# Altium PCB PCB_VIPER12A.PcbDoc
Units mil, origin at the board's own origin, x right, y up, seen from the top; angles counter-clockwise.
Board outline 6100 x 4200 mil, 2 copper layers (Top Layer, Bottom Layer); 31 components, 18 nets, 92 pads, 3 vias.
Unrouted connection lines stored in the file: 1.
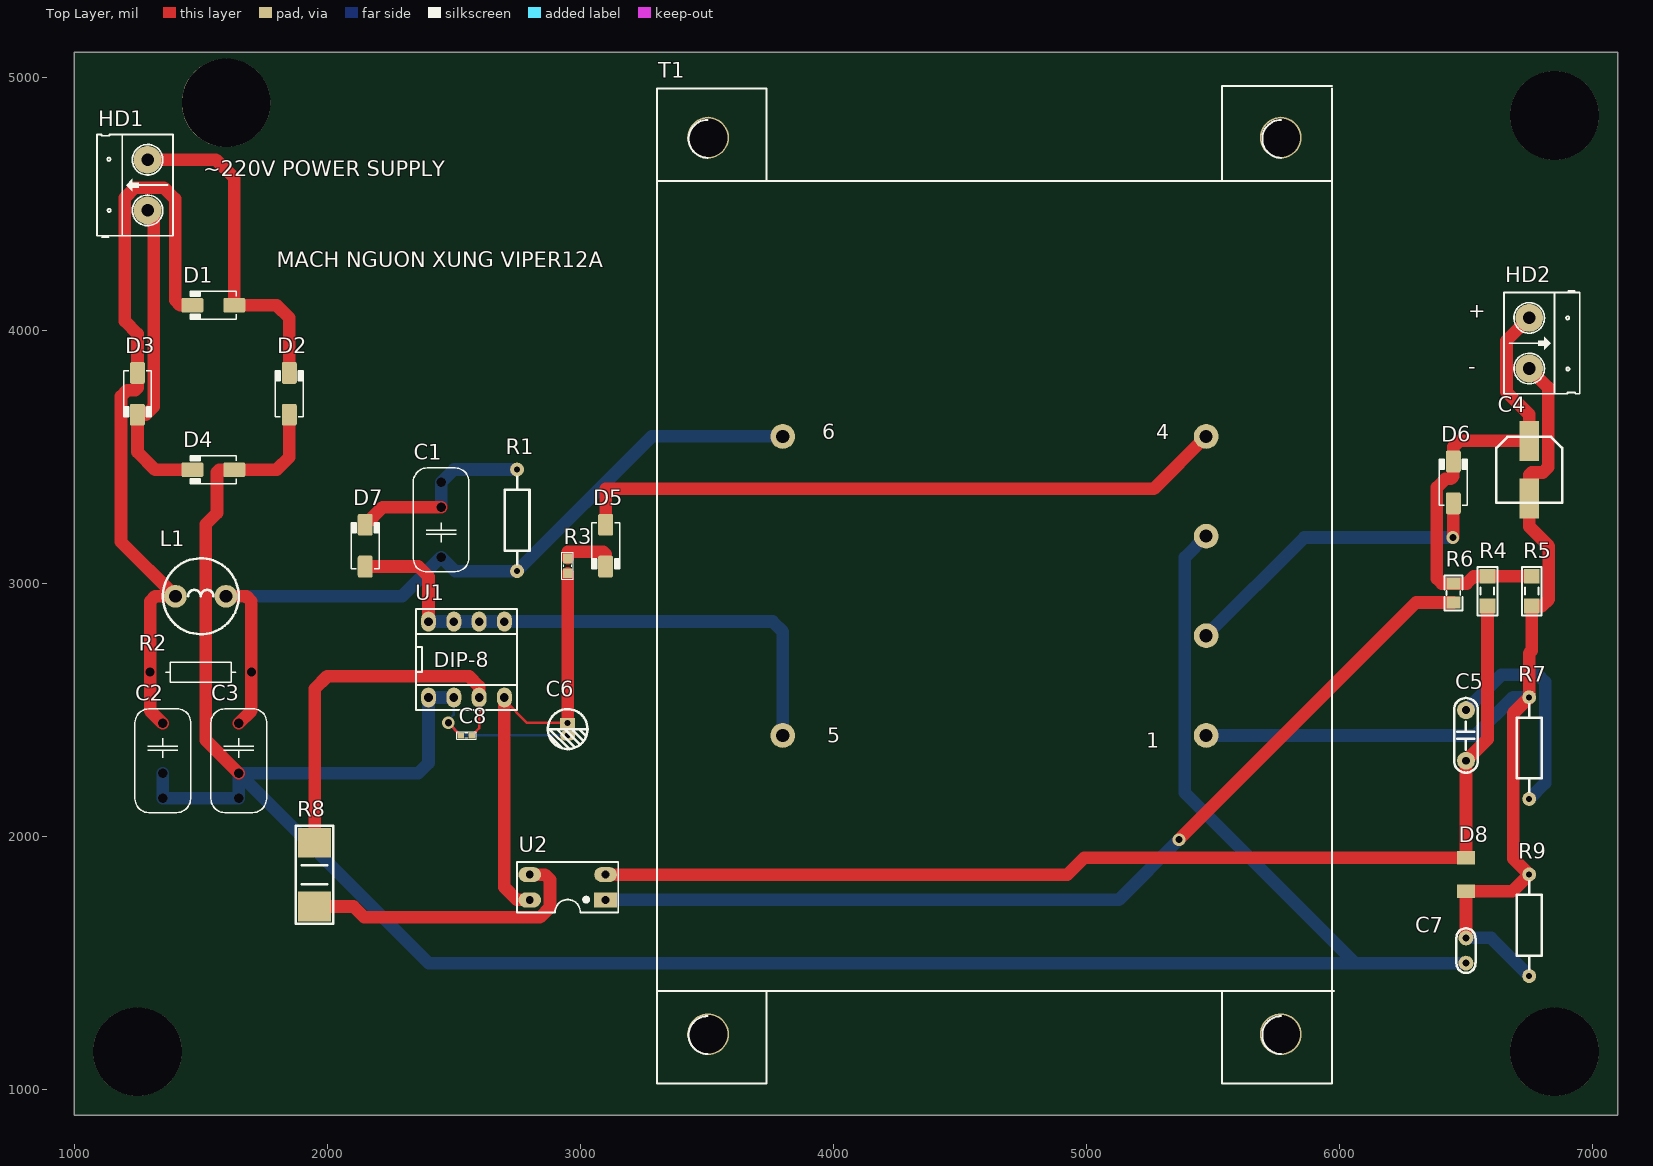
[diagram p0: Top Layer view]
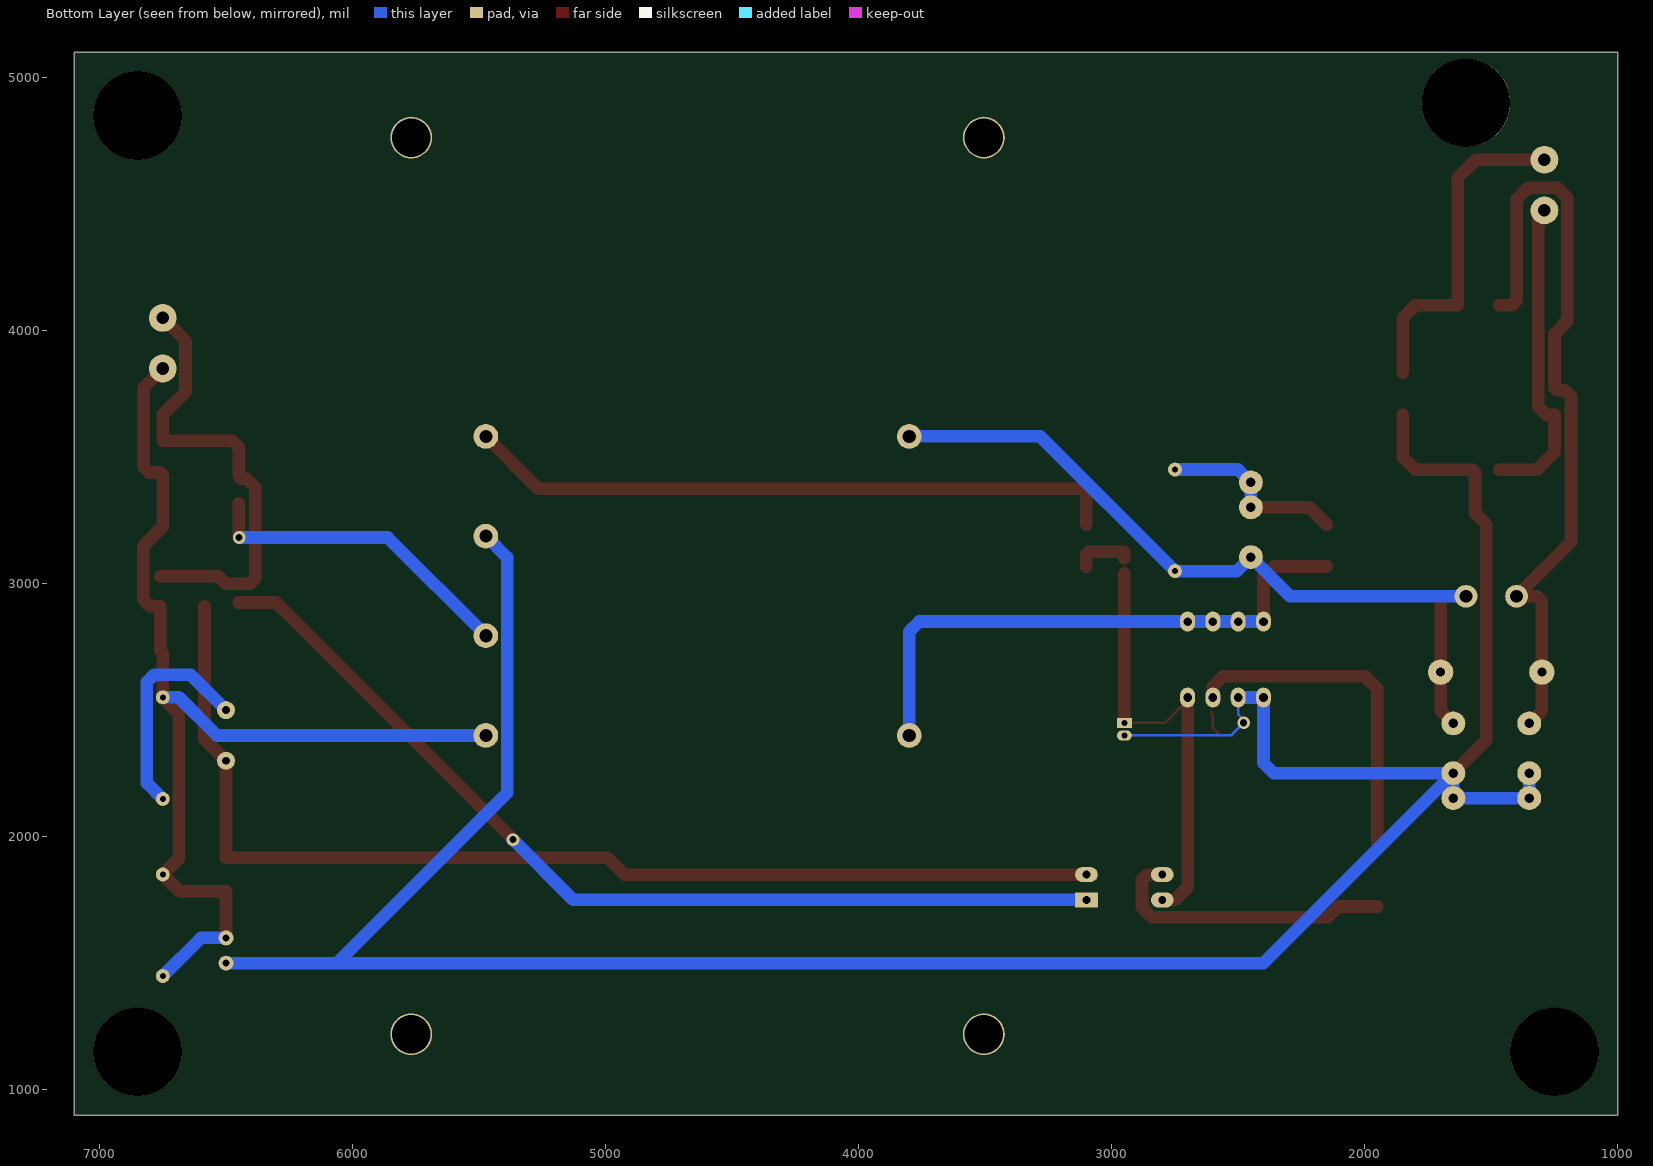
[diagram p1: Bottom Layer view, seen from below]
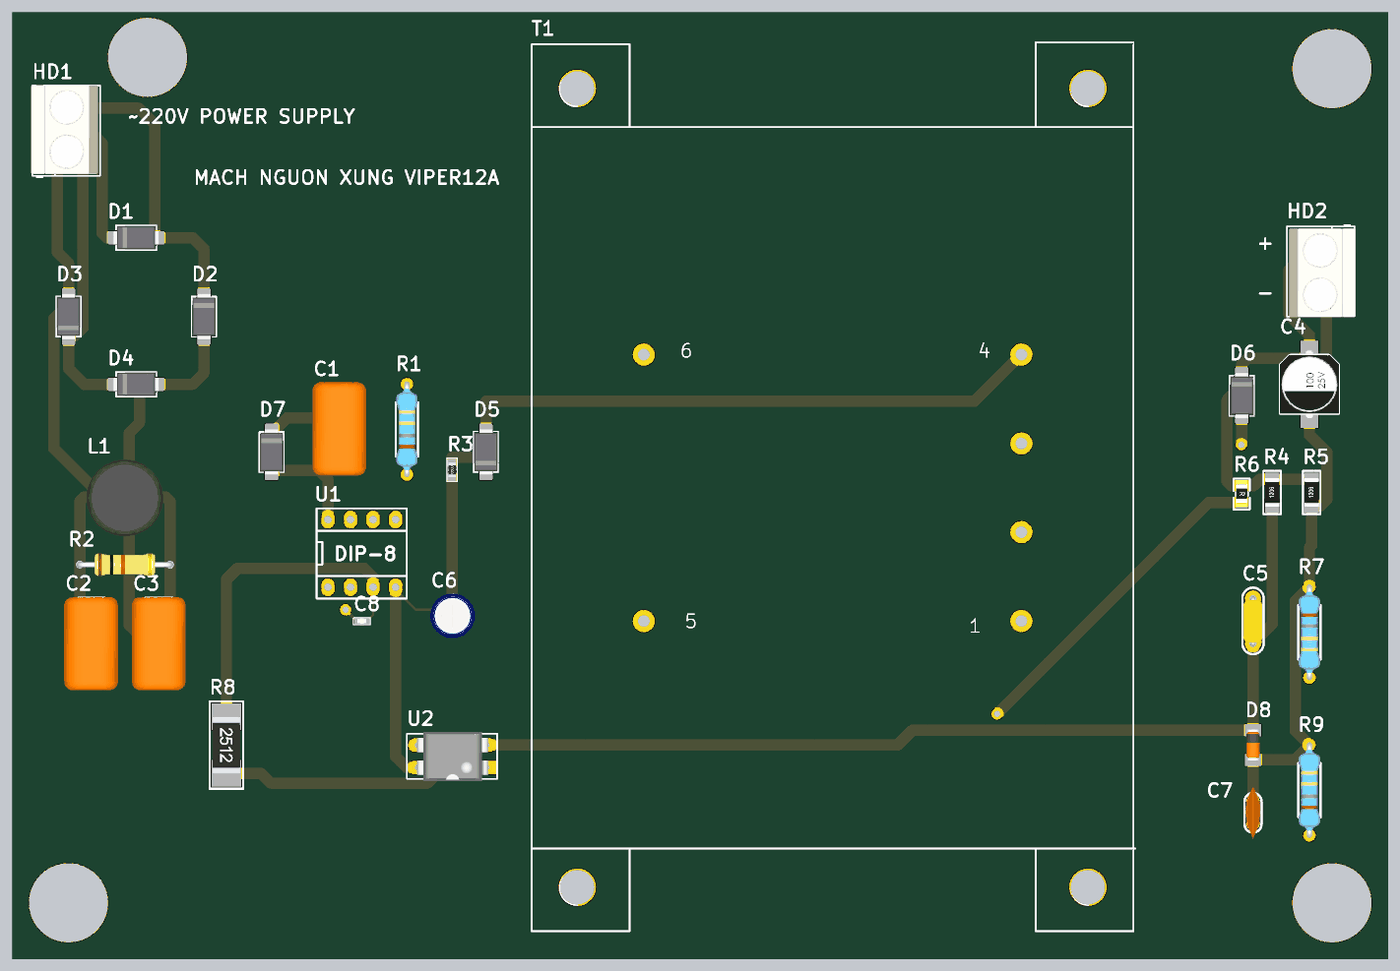
[diagram p2: 3D render of the assembled board from above, using the file's embedded part models]

## Layer stack, top to bottom
Top Solder: solder mask 0.4, Solder Resist, Dk 3.5
Top Layer: signal copper 1.4
Dielectric 1: dielectric 12.6, FR-4, Dk 4.8
Bottom Layer: signal copper 1.4
Bottom Solder: solder mask 0.4, Solder Resist, Dk 3.5

## Board outline
1000,900 7100,900 7100,5100 1000,5100

## Design rules (kind name [scope] priority, off if disabled: settings)
Clearance [All] p1: gap=10 ignorepadtopadclearanceinfootprint=FALSE except(0: Arc-Hole Track-Hole SMDPad-Hole THPad-Hole Via-Hole Fill-Hole Poly-Hole Region-Hole Text-Hole)
PolygonConnect [All] p1: connectstyle=Relief reliefconductorwidth=10 reliefentries=4 polygonreliefangle="90 Angle" airgapwidth=10
RoutingVias [All] p1: holewidth=28 width=50 viastyle="Through Hole" minholewidth=28 minwidth=50 maxholewidth=28 maxwidth=50
SolderMaskExpansion [All] p1: expansion=4 istentingtop=FALSE
Width [All] p1: maxlimit=50 minlimit=10 preferedwidth=50 minimp=50.000000 maximp=50.000000 favimp=50.000000
30 further rules are at their usual default settings.

## Components (designator, comment, footprint, x,y, rotation, side; value= is the part's Value field where it differs from the comment)
C1 "3n3" CAPMF5.0-7.5mm_SL 2450,3252.36 r90 top
C2 "3n9" CAPMF5.0-7.5mm_SL 1350,2300 r270 top
C3 "3n9" CAPMF5.0-7.5mm_SL 1650,2300 r270 top
C4 "120uF" "tu nhom 6.3 (d)" 6750,3450 r270 top
C5 "100nF" "tu tantalum dip5.08" 6500,2400 r90 top
C6 "10uF" "tu hoa 4mm" 2950,2425 r270 top
C7 "222" "tu gom" 6500,1550 r90 top
C8 "33nF" "tu 0402" 2550,2400 r180 top
D1 "Diode  1N4007" DO-214AC 1550,4100 r180 top value=1N4007
D2 "Diode  1N4007" DO-214AC 1850,3750 r90 top value=1N4007
D3 "Diode  1N4007" DO-214AC 1250,3750 r270 top value=1N4007
D4 "Diode  1N4007" DO-214AC 1550,3450 r180 top value=1N4007
D5 "Diode  1N4007" DO-214AC 3100,3150 r270 top value=1N4007
D6 "Diode  1N4007" DO-214AC 6450,3400 r90 top value=1N4007
D7 "Diode  1N4007" DO-214AC 2150,3150 r90 top value=1N4007
D8 "12V" "DIODE ZENNER SMD SOD80" 6500,1850 r270 top
HD1 "Header 2" HED2 1290,4475 r90 top
HD2 "Header 2" HED2 6750,4050 r270 top
L1 "100uH 3A" "CUON CAM 100uH3A" 1500,2950 r0 top
R1 "12k" "tro vach 1/4w" 2750,3250 r270 top
R2 "Carbon Film" RESTH_AXIAL-0.4 1500,2650 r0 top value=1K5
R3 "1M" "tro smd 0603" 2950,3070.47 r90 top
R4 "1k" "tro smd 1206" 6585,2970 r90 top
R5 "10k" "tro smd 1206" 6760,2970 r90 top
R6 "560R" "tro smd 0805" 6452.39,2962.77 r270 top
R7 "56k" "tro vach 1/4w" 6750,2350 r90 top
R8 "10k" "tro smd 2512" 1950,1850 r270 top
R9 "12k" "tro vach 1/4w" 6750,1650 r270 top
T1 "Trans3" TRF_6 4636.67,2990.83 r0 top
U1 "viper12A" DIP.100/8/W.300/L.400 2550,2700 r0 top
U2 "OPTO PC817 DIP4" DIP4 3102.52,1750 r90 top value=PC817

## Footprints (in the part's own frame and the unit in brackets; to place one, negate y for a bottom-side part, rotate by r counter-clockwise, add the part's x,y. Pads: shape width x height; smd on the part's side, far side on the other; paste and mask are expansions set on the pad)
CAPMF5.0-7.5mm_SL [mil] "Capacitor, THT, Metallized Polyester Film"
  round 0 / inner round 0 / far side round 94.49 hole 38 unplated: 1(-147.64,0) 2(49.21,0) 2(147.64,0)
  Bottom Layer lines w50: 49.21,0 147.64,0
  silkscreen extent -205,-110 205,110, body extent -207,-118 207,118, height 354
"CUON CAM 100uH3A" [mil] "100uH3A"
  round 90 hole 50: 1(-100,0) 2(100,0)
  silkscreen extent -150,-150 150,150, body extent -171,-175 171,167, height 394
"DIODE ZENNER SMD SOD80" [mm] "SOD80"
  rect 1.35x1.8 smd: 1(1.675,0) 2(-1.675,0)
  body extent -1.75,-0.76 1.75,0.74, height 1.45
DIP4 [mil] "W.300/L.400"
  rect 60x90 hole 31: 1(0,2.52)
  oval 60x90 hole 31: 2(100,2.52) 3(100,302.52) 4(0,302.52)
  silkscreen extent -50,-47 150,353, body extent -59,-7 159,307, height 170
DIP.100/8/W.300/L.400 [mm]
  oval 1.5x2 hole 0.864: 1(-3.81,-3.81) 2(-1.27,-3.81) 3(1.27,-3.81) 4(3.81,-3.81) 5(3.81,3.81) 6(1.27,3.81) 7(-1.27,3.81) 8(-3.81,3.81)
  silkscreen extent -5.08,-5.08 5.08,5.08, body extent -5.4,-3.88 5.4,3.88, height 4.5
DO-214AC [mm] "JEDEC DO214 variation AC. SMA"
  round 0.508 on Mech15: 0(0,0)
  rrect25% 2.2x1.5 smd: A(-2.1,0) K(2.1,0)
  silkscreen extent -2.3,-1.4 2.3,1.4, body extent -2.6,-1.3 2.6,1.3, height 2.42
HED2 [mil] "Header 2, 2 pin, hight 300mil, Pin to Pin 200, Colour Green"
  round 110 hole 50: 1(0,0) 2(200,0)
  silkscreen extent -106,-100 300,200, body extent -92,-90 302,205, height 394
RESTH_AXIAL-0.4 [mil]
  round 0 / inner round 0 / far side round 100 hole 36 unplated: 1(-200,0) 2(200,0)
  silkscreen extent -138,-40 138,40, body extent -212,-50 212,50, height 102
TRF_6 [mil] "Transformer; 6 Leads"
  round 98 hole 52: 1(836.67,-590.83) 2(836.67,-196.67) 3(836.67,196.67) 4(836.67,590.83) 5(-836.67,-590.83) 6(-836.67,590.83)
  round 165 hole 152: MH1(-1131.67,-1771.67) MH2(1131.67,-1771.67) MH3(1131.67,1771.67) MH4(-1131.67,1771.67)
  silkscreen extent -1333,-1967 1342,1975
"tro smd 0603" [mm] "Chip Capacitor, 2-Leads, Body 1,60x0,80mm, IPC Medium Density"
  rect 1x0.95 smd mask+0.076: 1(-0.75,0) 2(0.75,0)
  silkscreen extent -1.35,-0.58 1.37,0.58, body extent -0.82,-0.42 0.82,0.43, height 0.44
"tro smd 0805" [mm]
  rect 1.2x1.4 smd: 1(-0.946,-0.061) 2(0.954,-0.061)
  silkscreen extent -1.75,-0.97 1.75,0.84, body extent -1.56,-0.76 1.44,0.64, height 0.53
"tro smd 1206" [mm]
  rect 1.5x1.6 smd: 1(-1.5,0) 2(1.5,0)
  silkscreen extent -2.44,-0.99 2.44,0.99, body extent -1.6,-0.8 1.6,0.8, height 0.6
"tro smd 2512" [mm]
  rect 3x3.3 smd: 1(-3.2,0) 2(3.2,0)
  silkscreen extent -4.9,-1.88 4.93,1.88, body extent -3.12,-1.57 3.18,1.58, height 0.82
"tro vach 1/4w" [mm]
  round 1.4 hole 0.6: 1(-5.1,0) 2(5.1,0)
  silkscreen extent -4.39,-1.25 4.42,1.25, body extent -5.38,-1.2 5.38,1.2, height 2.41
"tu 0402" [mm]
  rect 0.65x0.6 smd: 1(-0.55,0) 2(0.55,0)
  silkscreen extent -0.97,-0.38 0.97,0.41, body extent -0.5,-0.27 0.5,0.26, height 0.35
"tu gom" [mm] "Tu gom mini"
  round 1.5 hole 0.7: 1(-1.27,0) 2(1.27,0)
  silkscreen extent -2.25,-0.97 2.22,0.97, body extent -2.92,-0.85 2.92,0.85, height 6.12
"tu hoa 4mm" [mm]
  rect 1x1.5 hole 0.6: 1(-0.635,0)
  oval 1x1.5 hole 0.6: 2(0.635,0)
  silkscreen extent -2,-2 2.01,2.01, body extent -2.47,-2.47 2.58,2.58, height 14.81
"tu nhom 6.3 (d)" [mm]
  rect 4x2 smd: 1(-2.9,0) 2(2.9,0)
  silkscreen extent -3.3,-3.3 3.3,3.3, body extent -3.8,-3.3 3.8,3.3, height 8
"tu tantalum dip5.08" [mm]
  round 1.8 hole 0.8: 1(-2.54,0) 2(2.54,0)
  silkscreen extent -3.74,-1.2 3.76,1.2, body extent -2.82,-1.08 2.77,1.08, height 6.27

## Part data
C1: library part CAPMF_3n3_400V_MPET, "Capacitor THD Metallized PET Film 3.3nF 10% 400V", Manufacturer 1="Wing Fu Technology", Manufacturer Part Number 1=CL21-332-K-400V-7.5, Package / Case="10.5L x 6.0W x 9.0H x 7.5mm Pitch", Ratings=400V, Tolerance=±10%, Material="Metallized Polyester", SCDType=spec
C2 C3: library part CAPMF_3n9_400V_MPET, "Capacitor THD Metallized PET Film 3.9nF 10% 400V", Manufacturer 1="Wing Fu Technology", Manufacturer Part Number 1=CL21-392-K-400V-7.5, Package / Case="10.5L x 6.0W x 9.0H x 7.5mm Pitch", Ratings=400V, Tolerance=±10%, Material="Metallized Polyester", SCDType=spec
C4: library part "Tu Nhom 120uF 10V", "Dán", Chung_Loai=Dán, Don_Vi=Con, Ma_Hang=MH004020, So_Chan=2, Ten_Linh_Kien="Tụ Nhôm 120uF 10V"
C5: library part "Tu tantalum 100nF 50V 20% DIP5.08", "Cắm", Chung_Loai=Cắm, Don_Vi=Con, Ma_Hang=MH003955, So_Chan=2, Ten_Linh_Kien="Tụ tantalum 104-100nF 50V 20% DIP5.08 (sứ vàng)(10PCS)"
C6: library part "Tu Hoa 10uF 25V 4x7", "Cắm", Chung_Loai=Cắm, Don_Vi=Con, Ma_Hang=MH001349, So_Chan=2, Ten_Linh_Kien="Tụ Hóa 10uF 25V 4x7MM"
C7: library part "Tu gom 222 50V", "Cắm", Chung_Loai=Cắm, Don_Vi=Con, Ma_Hang=MH004770, So_Chan=2, Ten_Linh_Kien="Tụ gốm 222-2.2nF 50V"
C8: library part "Tu 0402 33nF 10V", "Dán", Chung_Loai=Dán, Don_Vi=Con, Ma_Hang=MH007853, So_Chan=2, Ten_Linh_Kien="Tụ 0402 33nF X7R 10V GRM155R71A333KA01D"
D1 D2 D3 D4 D5 D6 D7: "Diode 1A"
D8: library part "Diode Zener 12V", "Dán", Chung_Loai=Dán, Don_Vi=Con, Ma_Hang=MH000945, Ten_Linh_Kien="Diode Zener 1/2W 12V SMD1206 ZMM12"
HD1 HD2: "Header 2 (Green)"
L1: library part "CUON CAM 100uH DIP", "Dán", Chung_Loai=Dán, Don_Vi=Con, Ma_Hang=MH002209, Ten_Linh_Kien="Cuộn Cảm 100uH 3A 8x10MM"
R1 R9: library part "Tro Vach 1/4W 5% 12k", "Cắm", Chung_Loai=Cắm, Don_Vi=Con, Ma_Hang=MH007389, So_Chan=2, Ten_Linh_Kien="Trở Vạch 1/4w 5% 12k"
R2: library part RES_Axial_0.5W, "Resistor THD Axial 1.5k Ohm 0.5W 5% Carbon Film", Manufacturer 1=Yageo, Manufacturer Part Number 1=CFR-50JB-1K5, Package / Case=Axial, Ratings=1/2W, Supplier Part Number 1=1.5KH-ND, Tolerance=±5%, SCDType=spec, Supplier 1=Digi-Key
R3: library part "Tro 0603 5% 1M", "Dán", Chung_Loai=Dán, Don_Vi=Con, Ma_Hang=MH006909, So_Chan=2, Ten_Linh_Kien="Trở 0603 5% 1M"
R4: library part "Tro 1206 1% 1k", "Dán", Chung_Loai=Dán, Don_Vi=Con, Ma_Hang=MH005880, So_Chan=2, Ten_Linh_Kien="Trở 1206 1% 1k"
R5: library part "Tro 1206 1% 10k", "Dán", Chung_Loai=Dán, Don_Vi=Con, Ma_Hang=MH005885, So_Chan=2, Ten_Linh_Kien="Trở 1206 1% 10k"
R6: library part "Tro 0805 5% 560R", "Dán", Chung_Loai=Dán, Don_Vi=Con, Ma_Hang=MH005261, So_Chan=2, Ten_Linh_Kien="Trở 0805 5% 560R"
R7: library part "Tro Vach 1/4W 5% 56k", "Cắm", Chung_Loai=Cắm, Don_Vi=Con, Ma_Hang=MH007329, So_Chan=2, Ten_Linh_Kien="Trở Vạch 1/4w 5% 56k"
R8: library part "Tro 2512 5% 10k", "Dán", Chung_Loai=Dán, Don_Vi=Con, Ma_Hang=MH003439, So_Chan=2, Ten_Linh_Kien="Trở 2512 5% 103-10k 1W"
T1: "Three-winding Transformer (Non-Ideal)", LatestRevisionDate=17-Jul-2002, LatestRevisionNote="Re-released for DXP Platform.", PackageDescription="Transformer; 6 Leads", PackageReference=TRF_6, Published=25-Jan-2001, Publisher="Altium Limited", Sim Note="Enter the turns ratios, Core loss resistance, Magnetising Reactance, Leakage Reactances and Resistances referred to the primary side into the parameter fields."
U2: "Single Opto"

## Free pads (board coordinates)
  round 350 hole 350: 2(6850,4850) 3(6850,1150) 4(1600,4900) 5(1250,1150)

## Via types
v1: diameter 50, hole 28, Top Layer to Bottom Layer, 3 vias

## Nets (pads, with @x,y where several pads share a name; then routed paths per layer and width w, separated by ;. In a path a pad name is that pad's centre, name@x,y a point inside that pad or via, vN(x,y) a via of type N, cw(c..) or ccw(c..) an arc to the next point about the centre after c; other vN are vias at no path point)
F: C4.2 C7.2 D8.1 HD2.2 R5.1 R7.2 R9.1 R9.2 T1.1 | length 4339.8
  Top Layer w50: C7.2 D8.1 6683.27,1784.06 R9.1 6687,1913.79 6687,2487.79 R7.2 6750,2725 6760,2735 R5.1 6800,2910.94 6827,2937.94 6827,3148 6750,3225 C4.2 6750,3429 6760,3439 6804,3439 6825,3460 6825,3775 HD2.2
  Bottom Layer w50: T1.1 6536.21,2400 6687,2550.79 R7.2 ; C7.2 6599.21,1600 R9.2
GND: C2.2 C3.2 C6.2 C7.1 C8.2 D2.A D4.A T1.3 U1.1 U1.2 | length 11000
  Top Layer w10: v1(2478.35,2450) 2478.35,2449.02 2527.36,2400 C8.2
  Top Layer w50: 1650,2250.79 1520,2380.79 1520,3235 1564,3279 1564,3440 1574,3450 D4.A 1800,3450 1850,3500 D2.A
  Bottom Layer w10: U1.2 2500,2482.48 2478.35,2460.82 v1(2478.35,2450) 2528.35,2400 C6.2
  Bottom Layer w50: C2.2@1350,2152.36 C3.2@1650,2152.36 ; U1.2 U1.1 2400,2290.79 2360,2250.79 1650,2250.79 2400.79,1500 6062,1500 ; T1.3 5389,3103.17 5389,2173 6062,1500 ; C7.1 6062,1500
NetC1_1: C1.1 C3.1 L1.2 R1.2 R2.2 T1.6 | length 3119
  Top Layer w50: L1.2 1680,2950 1700,2930 R2.2 1700,2497.64 C3.1
  Bottom Layer w50: L1.2 2295.28,2950 C1.1 2505.51,3049.21 R1.2 3282.45,3581.67 T1.6
NetC1_2: C1.2 D7.K R1.1 | length 649.6
  Top Layer w50: D7.K 2218.9,3301.57 2450,3301.57
  Bottom Layer w50: C1.2@2450,3400 2500.79,3450.79 R1.1
NetC2_1: C2.1 D1.K D3.A L1.1 R2.1 | length 3052
  Top Layer w50: C2.1 1300,2497.64 R2.1 1300,2930 1320,2950 L1.1 1185,3165 1185,3740 1209,3764 1240,3764 1250,3774 D3.A 1250,3987 1200,4037 1200,4525 1240,4565 1354,4565 1399,4520 1399,4120 1419,4100 D1.K
NetC4_1: C4.1 D6.K HD2.1 R4.2 R5.2 R6.1 | length 1824.9
  Top Layer w50: HD2.1 6660,3960 6660,3758 6750,3668 C4.1 6474.17,3564.17 6450,3540 D6.K 6450,3424 6440,3414 6419,3414 6385,3380 6385,3020 6405,3000 R6.1 6502,3000 6531.06,3029.06 R4.2 R5.2
NetC5_1: C5.1 D8.2 R4.1 U2.2 | length 4457.5
  Top Layer w50: U2.2 4925,1850 4990.94,1915.94 D8.2 C5.1 6585,2385 R4.1
NetC5_2: C5.2 R7.1 | length 870.9
  Bottom Layer w50: C5.2 6640,2640 6784,2640 6813,2611 6813,2212.21 R7.1
NetC6_1: C6.1 R3.1 U1.4 U2.4 | length 1743.7
  Top Layer w10: U1.4 2700,2540.16 2790.16,2450 C6.1
  Top Layer w50: U1.4@2700,2540.16 2700,1800 2750,1750 U2.4 ; C6.1@2950,2455.31 R3.1
NetC8_1: C8.1 R8.1 U1.3 | length 1448.2
  Top Layer w10: C8.1 2572.64,2400 2579.45,2406.81 2579.45,2407.8 2600,2428.35 2600,2480 2605.86,2485.86 2605.86,2494.14
  Top Layer w50: R8.1 1950,2584 2000,2634 2560,2634 2600,2594 U1.3
NetD1_A: D1.A D2.K HD1.2 | length 1330.5
  Top Layer w50: HD1.2 1560,4675 1632.68,4602.32 D1.A 1800,4100 1850,4050 D2.K
NetD3_K: D3.K D4.K HD1.1 | length 1257.7
  Top Layer w50: D3.K D3.K@1250,3667 ; HD1.1 1315,4450 1315,3700 1282,3667 D3.K@1250,3667 ; D4.K 1320,3450 1250,3520 D3.K@1250,3667
NetD5_A: D5.A T1.4 | length 2600.7
  Top Layer w50: D5.A 3100,3374 3101,3375 5266.67,3375 T1.4
NetD5_K: D5.K R3.2 | length 228.8
  Top Layer w50: R3.2 2950,3126 3090,3126 3100,3116 D5.K
NetD6_A: D6.A T1.2 | length 1271.5
  Top Layer w50: v1(6448,3182) 6450,3184 D6.A
  Bottom Layer w50: T1.2 5861.17,3182 v1(6448,3182)
NetD7_A: D7.A T1.5 U1.5 U1.6 U1.7 U1.8 | length 2270.5
  Top Layer w50: D7.A 2360,3067.32 2400,3027.32 U1.8
  Bottom Layer w50: U1.8 U1.7 U1.6 U1.5 3760,2850 3800,2810 T1.5
NetR6_2: R6.2 U2.1 | length 3836.8
  Top Layer w50: v1(5366,1988) 6303.2,2925.2 R6.2
  Bottom Layer w50: U2.1 5128,1750 v1(5366,1988)
NetR8_2: R8.2 U2.3 | length 1161.7
  Top Layer w50: R8.2 2103.98,1724.02 2147,1681 2840,1681 2880,1721 2880,1830 2860,1850 U2.3
pads on no net: D1.0 D2.0 D3.0 D4.0 D5.0 D6.0 D7.0 T1.MH1 T1.MH2 T1.MH3 T1.MH4

## Silkscreen, mask and mechanical layers (free items; w line width, h text height)
Top Overlay:
  text "~220V POWER SUPPLY" at 1510,4610 h60
  text "MACH NGUON XUNG VIPER12A" at 1800,4250 h60
  text "+" at 6510,4050 h60
  text "-" at 6510,3830.01 h60

## Text inside footprints (layer, text, board x,y; h text height)
T1: Top Overlay "6" at 3956.67,3570.83 h59.06; Top Overlay "4" at 5276.67,3570.83 h59.06; Top Overlay "1" at 5236.67,2350.83 h59.06; Top Overlay "5" at 3976.67,2370.83 h59.06
U1: Top Overlay "DIP-8" at 2420,2670 h59.05